# EAGLE board dac (EAGLE 6.1)
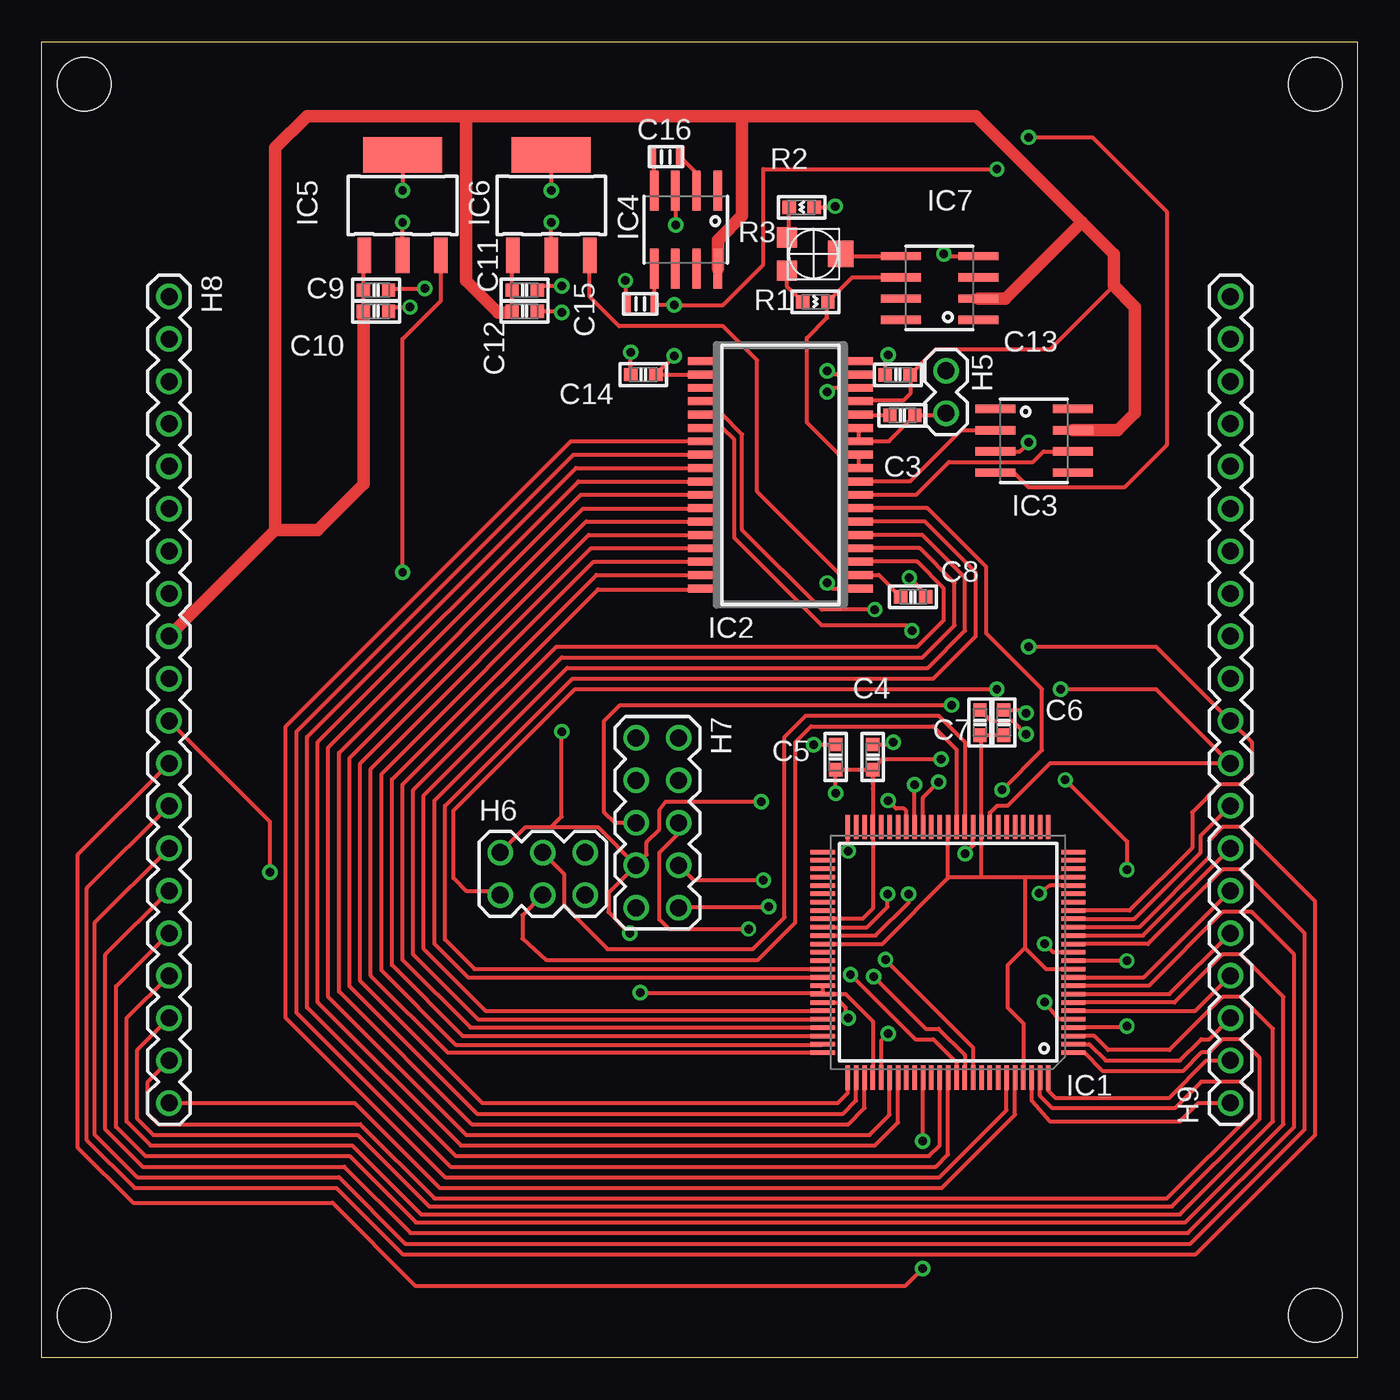
[diagram p0: board, top side]
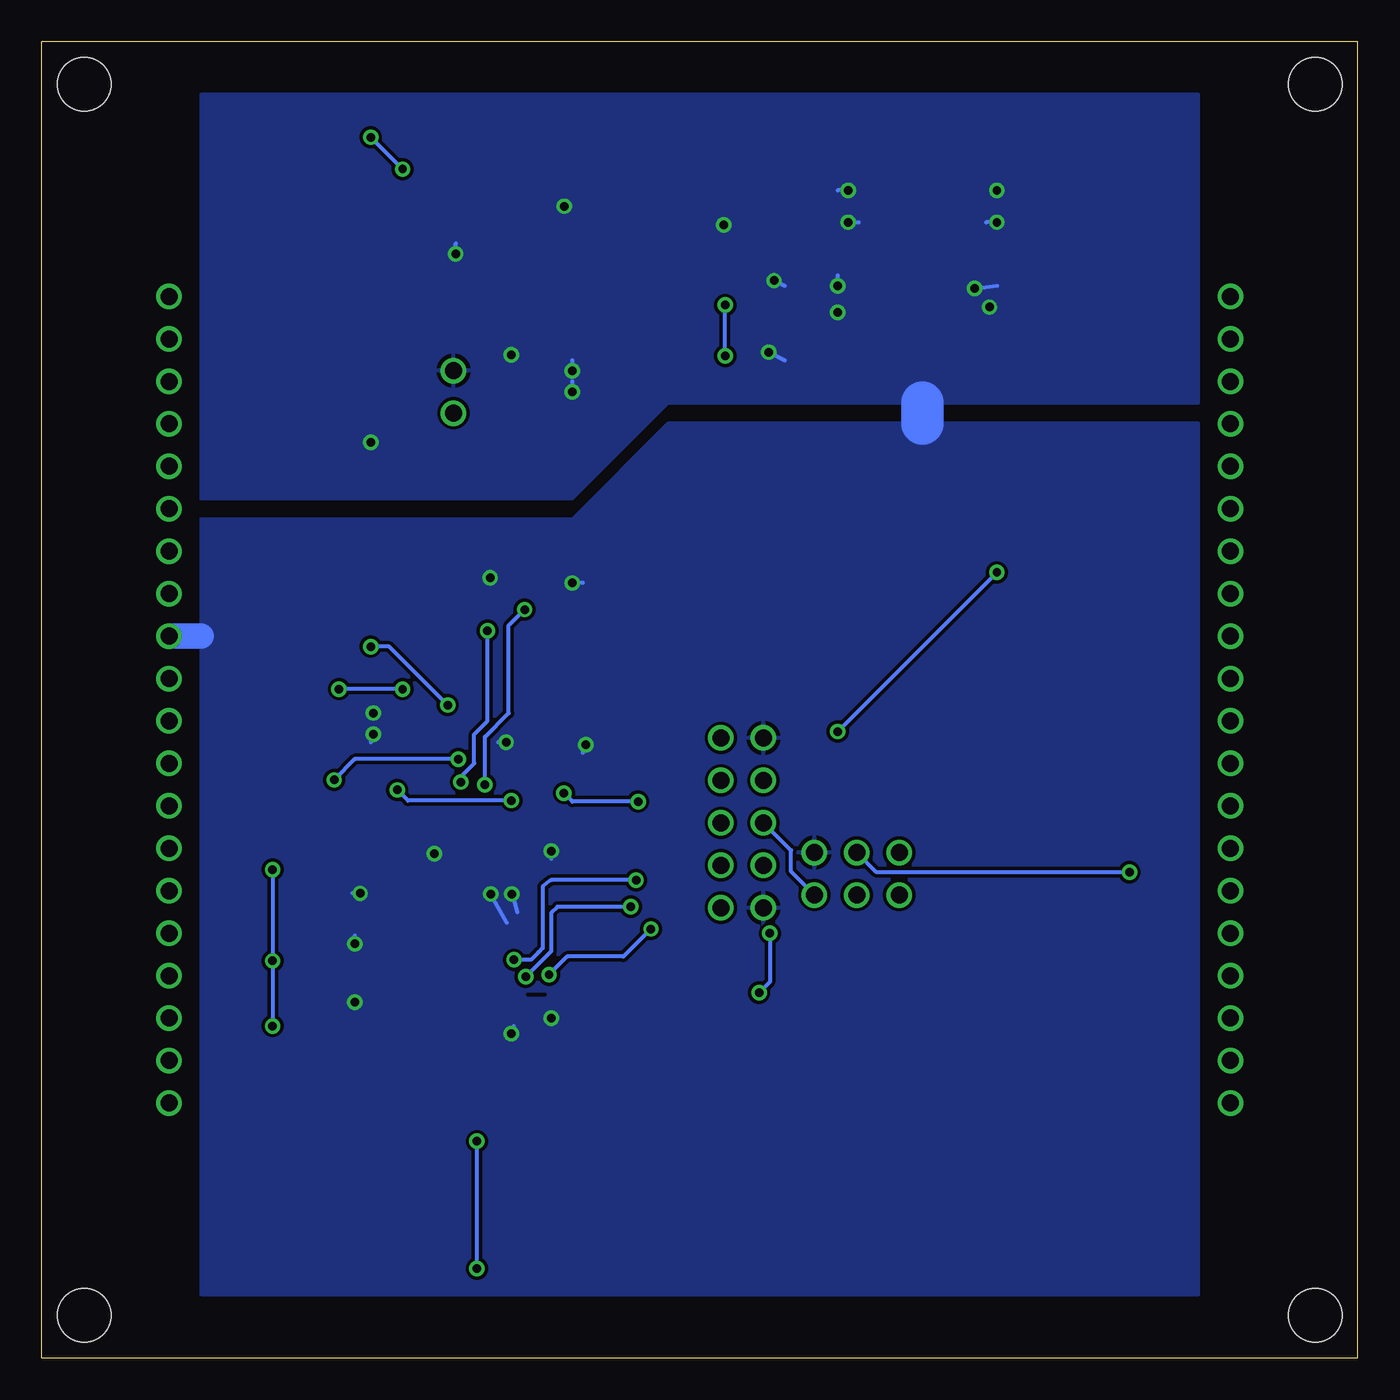
[diagram p1: board, bottom side, seen from below]

Size 78.74 x 78.74 mm. Coordinates in mm from the lower left corner, seen from the top.
Outline: 78.74,0 0,0 0,78.74 78.74,78.74 78.74,0
Copper layers (1*16): Top 0.035mm / dielectric 1.5mm / Bottom 0.035mm
Design rules: minimum track width 8mil, minimum drill 20mil, track to track 8mil, track to pad 8mil, pad to pad 8mil, via to via 8mil, smd to smd 8mil, copper to edge 40mil, drill to drill 8mil, minimum pad ring 10mil, minimum via ring 8mil, stop-mask expansion 4mil, vias tented up to drill 0mil, thermal gap 10mil
Holes 3.2 mm at 2.54,76.2 76.2,76.2 2.54,2.54 76.2,2.54
bRestrict: 1 lines

## Footprints (pad centres in the part's own frame; a part is rotated, then mirrored left to right if it is on the bottom)
CAP-0603 = smd 0.8 x 0.8: 1 -0.75,0; 2 0.75,0
0805 = smd 0.5 x 1.25: 1 -0.85,0; 2 0.85,0
HM2X1-PTH = drill 1.016: 1 -1.27,0; 2 1.27,0
HM3X2-PTH = drill 1.016: 1 -2.54,1.27; 2 0,1.27; 3 2.54,1.27; 4 2.54,-1.27; 5 0,-1.27; 6 -2.54,-1.27
HM5X2-PTH = drill 1.016: 1 -5.08,1.27; 2 -2.54,1.27; 3 0,1.27; 4 2.54,1.27; 5 5.08,1.27; 6 5.08,-1.27; 7 2.54,-1.27; 8 0,-1.27; 9 -2.54,-1.27; 10 -5.08,-1.27
HM20X1-PTH = drill 1.016: 1 -24.13,0; 2 -21.59,0; 3 -19.05,0; 4 -16.51,0; 5 -13.97,0; 6 -11.43,0; 7 -8.89,0; 8 -6.35,0; 9 -3.81,0; 10 -1.27,0; 11 1.27,0; 12 3.81,0; 13 6.35,0; 14 8.89,0; 15 11.43,0; 16 13.97,0; 17 16.51,0; 18 19.05,0; 19 21.59,0; 20 24.13,0
TQFP-100 = smd 1.45 x 0.27: 1 -7.5,6; 2 -7.5,5.5; 3 -7.5,5; 4 -7.5,4.5; 5 -7.5,4; 6 -7.5,3.5; 7 -7.5,3; 8 -7.5,2.5; 9 -7.5,2; 10 -7.5,1.5; 11 -7.5,1; 12 -7.5,0.5; 13 -7.5,0; 14 -7.5,-0.5; 15 -7.5,-1; 16 -7.5,-1.5; 17 -7.5,-2; 18 -7.5,-2.5; 19 -7.5,-3; 20 -7.5,-3.5; 21 -7.5,-4; 22 -7.5,-4.5; 23 -7.5,-5; 24 -7.5,-5.5; 25 -7.5,-6; 51 7.5,-6; 52 7.5,-5.5; 53 7.5,-5; 54 7.5,-4.5; 55 7.5,-4; 56 7.5,-3.5; 57 7.5,-3; 58 7.5,-2.5; 59 7.5,-2; 60 7.5,-1.5; 61 7.5,-1; 62 7.5,-0.5; 63 7.5,0; 64 7.5,0.5; 65 7.5,1; 66 7.5,1.5; 67 7.5,2; 68 7.5,2.5; 69 7.5,3; 70 7.5,3.5; 71 7.5,4; 72 7.5,4.5; 73 7.5,5; 74 7.5,5.5; 75 7.5,6 | smd 0.27 x 1.45: 26 -6,-7.5; 27 -5.5,-7.5; 28 -5,-7.5; 29 -4.5,-7.5; 30 -4,-7.5; 31 -3.5,-7.5; 32 -3,-7.5; 33 -2.5,-7.5; 34 -2,-7.5; 35 -1.5,-7.5; 36 -1,-7.5; 37 -0.5,-7.5; 38 0,-7.5; 39 0.5,-7.5; 40 1,-7.5; 41 1.5,-7.5; 42 2,-7.5; 43 2.5,-7.5; 44 3,-7.5; 45 3.5,-7.5; 46 4,-7.5; 47 4.5,-7.5; 48 5,-7.5; 49 5.5,-7.5; 50 6,-7.5; 76 6,7.5; 77 5.5,7.5; 78 5,7.5; 79 4.5,7.5; 80 4,7.5; 81 3.5,7.5; 82 3,7.5; 83 2.5,7.5; 84 2,7.5; 85 1.5,7.5; 86 1,7.5; 87 0.5,7.5; 88 0,7.5; 89 -0.5,7.5; 90 -1,7.5; 91 -1.5,7.5; 92 -2,7.5; 93 -2.5,7.5; 94 -3,7.5; 95 -3.5,7.5; 96 -4,7.5; 97 -4.5,7.5; 98 -5,7.5; 99 -5.5,7.5; 100 -6,7.5
SSOP-36 = smd 1.7 x 0.47: 1 -4.675,6.8; 2 -4.675,6; 3 -4.675,5.2; 4 -4.675,4.4; 5 -4.675,3.6; 6 -4.675,2.8; 7 -4.675,2; 8 -4.675,1.2; 9 -4.675,0.4; 10 -4.675,-0.4; 11 -4.675,-1.2; 12 -4.675,-2; 13 -4.675,-2.8; 14 -4.675,-3.6; 15 -4.675,-4.4; 16 -4.675,-5.2; 17 -4.675,-6; 18 -4.675,-6.8; 19 4.675,-6.8; 20 4.675,-6; 21 4.675,-5.2; 22 4.675,-4.4; 23 4.675,-3.6; 24 4.675,-2.8; 25 4.675,-2; 26 4.675,-1.2; 27 4.675,-0.4; 28 4.675,0.4; 29 4.675,1.2; 30 4.675,2; 31 4.675,2.8; 32 4.675,3.6; 33 4.675,4.4; 34 4.675,5.2; 35 4.675,6; 36 4.675,6.8
SOIC-8 = smd 2.388 x 0.5: 1 -2.324,1.905; 2 -2.324,0.635; 3 -2.324,-0.635; 4 -2.324,-1.905; 5 2.324,-1.905; 6 2.324,-0.635; 7 2.324,0.635; 8 2.324,1.905
SOT-223-4 = smd 2.11 x 0.81: 1 -3,2.3; 2 -3,0; 3 -3,-2.3 | smd 2.11 x 4.72: 4 3,0
RES-0603 = smd 0.8 x 0.8: 1 -0.75,0; 2 0.75,0
3303W = smd 1.206 x 1.194: 1 -0.997,-1.587; 3 0.997,-1.587 | smd 1.6 x 1.499: 2 0,1.638

## Placement (x,y rotation side)
C3  22pF  [CAP-0603]  51.5,56.39 180 top
C4  4.7uF  [CAP-0603]  49.72,35.94 270 top
C5  1nF  [CAP-0603]  47.5,35.94 270 top
C6  470pF  [CAP-0603]  57.56,38 270 top
C7  2.2uF  [CAP-0603]  56.13,38 270 top
C8  .1uF  [CAP-0603]  52.13,45.53 0 top
C9  47uF  [CAP-0603]  20,63.88 180 top
C10  .1uF  [CAP-0603]  20,62.61 180 top
C11  .1uF  [CAP-0603]  28.89,63.88 180 top
C12  47uF  [CAP-0603]  28.89,62.61 180 top
C13  0.1uF  [CAP-0603]  51.22,58.81 0 top
C14  0.1uF  [CAP-0603]  35.99,58.83 180 top
C15  10uF  [0805]  35.81,63.06 0 top
C16  10uF  [0805]  37.35,71.86 180 top
H5  H2X1-PTH  [HM2X1-PTH]  54.1,57.79 90 top
H6  HM3X2-PTH  [HM3X2-PTH]  29.97,28.96 0 top
H7  HM5X2-PTH  [HM5X2-PTH]  36.83,32 270 top
H8  HM20X1-PTH  [HM20X1-PTH]  7.62,39.37 270 top
H9  HM20X1-PTH  [HM20X1-PTH]  71.12,39.37 90 top
IC1  AT32UC3A-TQFP-100  [TQFP-100]  54.23,24.26 180 top
IC2  LTC1821-SSOP-36  [SSOP-36]  44.2,52.83 180 top
IC3  LT1001-SOIC-8  [SOIC-8]  59.37,54.86 0 top
IC4  TC7662B-SOIC-8  [SOIC-8]  38.54,67.5 270 top
IC5  3.3V  [SOT-223-4]  21.59,68.96 90 top
IC6  5V  [SOT-223-4]  30.48,68.96 90 top
IC7  10V  [SOIC-8]  53.72,64.01 180 top
R1  90.9k  [RES-0603]  46.29,63.18 0 top
R2  4.02k  [RES-0603]  45.47,68.83 180 top
R3  5k  [3303W]  46.16,66.04 270 top

## Library data of the parts
C3-C16 IC1-IC7 R1-R3 = july13b
H5-H9 = august24

## Nets
1: H9.20
2: H9.19
3: H9.18
4: H9.17
5: H9.16
6: H9.15
7: H9.14
8: H9.13
9: C4.1 C5.1 C6.1 C7.1 C8.2 C9.1 C10.1 C11.1 C12.1 C13.1 C14.2 C15.1 H5.2 H6.3 H7.6 H7.10 H9.12 IC1.5 IC1.13 IC1.21 IC1.35 IC1.50 IC1.60 IC1.61 IC1.69 IC1.80 IC2.1 IC2.16 IC2.17 IC3.3 IC4.3 IC5.2 IC5.4 IC6.2 IC6.4 IC7.4 R2.1
10: H9.11
11: H6.4 H7.8 H9.10 IC1.18
12: H6.6 H9.9 IC1.33
13: H9.8 IC1.17
14: H9.7 IC1.15
15: H9.6 IC1.10
16: H9.5 IC1.8
17: H9.4 IC1.6
18: H9.3 IC1.2
19: H9.2 IC1.100
20: H9.1 IC1.98
21: H8.20 IC1.96
22: H8.19 IC1.99
23: H8.18 IC1.1
24: H8.17 IC1.3
25: H8.16 IC1.7
26: H8.15 IC1.9
27: H8.14 IC1.14
28: H8.13 IC1.16
29: H8.12 IC1.85
30: H6.2 H8.11 IC1.36
31: H8.10
32: C9.2 C10.2 C11.2 C12.2 C13.2 H8.9 IC2.15 IC3.7 IC4.8 IC5.1 IC6.1 IC7.2
33: H8.8
34: H8.7
35: H8.6
36: H8.5
37: H8.4
38: H8.3
39: H8.2
40: H8.1
N$1: IC2.9 IC3.2
N$2: C8.1 IC2.2 IC6.3
N$3: IC2.8 IC3.6
N$4: C3.1 H5.1 IC2.12 IC2.13
N$5: C3.2 IC2.14
N$6: C16.1 IC4.2
N$7: C16.2 IC4.4
N$8: C4.2 C5.2 H6.1 H7.7 IC1.4 IC1.12 IC1.47 IC1.59 IC1.67 IC1.68 IC1.79 IC5.3
N$9: C6.2 C7.2 IC1.11 IC1.22 IC1.34 IC1.38 IC1.62 IC1.97
N$10: C14.1 C15.2 IC2.20 IC3.4 IC4.5
N$11: IC1.65 IC2.6
N$12: IC1.66 IC2.5
N$13: IC1.70 IC2.4
N$14: IC1.71 IC2.3
N$15: IC1.72 IC2.36
N$16: IC1.73 IC2.35
N$17: IC1.74 IC2.34
N$18: IC1.75 IC2.33
N$19: IC1.76 IC2.32
N$20: IC1.77 IC2.31
N$21: IC1.78 IC2.30
N$22: IC1.81 IC2.29
N$23: IC1.82 IC2.28
N$24: IC1.87 IC2.27
N$25: IC1.88 IC2.26
N$26: IC1.95 IC2.25
N$27: IC1.41 IC2.24
N$28: IC1.42 IC2.23
N$29: IC1.43 IC2.7
N$30: IC2.10 IC2.11 IC7.6 R1.2
N$31: IC7.5 R3.2
N$32: R1.1 R3.3
N$33: R2.2 R3.1
N$34: H7.5 IC1.90
N$35: H7.4 IC1.91
N$36: H7.3 IC1.89
N$37: IC1.92
N$39: H6.5 IC1.37

## Tracks (layer width: path | path; a pad name or v marks a point on that pad's centre or on a via)
9  (via drill 0.51)
  Top 0.254: IC5.4 v21.59,69.85 | IC5.2 v21.59,67.94 | C9.1 20.85,63.98 v22.92,63.98 | C10.1 21.01,62.87 v22.04,62.87 | IC6.4 v30.48,69.85 | IC6.2 v30.48,67.94 | C11.1 29.9,64.14 v31.11,64.14 | C12.1 31.02,62.61 v31.11,62.55 | C15.1 34.96,64.1 v34.93,64.45 | C14.2 35.24,59.37 v35.24,60.17 | IC4.3 37.91,67.98 v37.94,67.79 | R2.1 47.4,68.83 v47.47,68.9 | IC7.4 54.1,65.91 v53.98,66.04 | IC2.16 47.24,58.03 v46.99,57.79 | IC2.17 47.21,58.83 v46.99,59.05 | C13.1 50.47,59.84 v50.64,60.01 | IC3.3 58.52,54.23 v59.05,54.77 | C8.2 52.88,45.7 v51.91,46.67 | IC2.1 47.31,46.03 v46.99,46.36 | C5.1 46.53,36.69 v46.2,36.67 | C4.1 50.82,36.69 v50.96,36.83 | IC1.50 48.23,30.51 v48.26,30.32 | C6.1 58.72,38.76 v58.9,38.58 | IC1.60 49.38,25.76 50.61,26.99 v50.61,27.75 | IC1.69 47.8,21.26 48.1,20.95 48.1,20.48 v48.26,20.32 | IC1.21 60.32,28.26 v59.69,27.78 | IC1.5 60.86,20.26 v60.01,21.27 | IC1.35 55.73,30.65 v55.25,30.16 | IC1.80 50.23,18.99 v50.64,19.4 | IC1.13 60.52,24.26 v60.01,24.77 | IC1.61 49.9,25.26 51.88,27.24 v51.88,27.75 | C7.1 56.79,38.1 58.1,38.1 v58.9,37.31
  Bottom 0.254: v21.59,67.94 22.22,67.94 | v22.92,63.98 21.59,64.14 | 21.59,64.14 | v22.04,62.87 22.22,62.87 | v30.48,69.85 31.11,69.85 | v30.48,67.94 29.84,67.94 | v31.11,64.14 31.11,64.77 | v31.11,62.55 31.11,62.23 | v34.93,64.45 34.29,64.14 | v35.24,60.17 34.29,59.69 | v37.94,67.79 38.1,67.94 | v47.47,68.9 47.47,69.06 47.62,69.21 | v53.98,66.04 53.98,66.67 | H5.2 54.61,59.05 | v46.99,57.79 46.99,58.42 | v46.99,59.05 46.99,59.69 | v50.64,60.01 50.64,60.17 50.8,60.33 | v59.05,54.77 59.05,54.61 | v51.91,46.67 51.91,46.83 52.07,46.99 | 46.36,46.36 v46.99,46.36 | v46.2,36.67 46.36,36.2 | v50.96,36.83 51.44,36.83 | v48.26,30.32 48.26,29.84 | v58.9,38.58 59.05,38.58 | v50.61,27.75 50.29,26.67 | v48.26,20.32 48.26,20 | v59.69,27.78 60.17,27.78 | v60.01,21.27 59.85,21.59 | v55.25,30.16 55.56,30.32 | v50.64,19.4 50.48,19.84 | v60.01,24.77 60.01,25.24 | v51.88,27.75 50.93,26.04 | v58.9,37.31 59.05,36.83
  Bottom 1.524: 69.21,43.18 H9.12
  Bottom 2.54: 26.04,55.88 26.04,57.15
  pour Bottom: 69.21,51.44 46.99,51.44 41.28,57.15 9.53,57.15 9.53,75.56 69.21,75.56
  pour Bottom: 9.53,55.88 41.28,55.88 46.99,50.17 69.21,50.17 69.21,3.81 9.53,3.81
11  (via drill 0.51)
  Top 0.254: H7.8 34.29,32 33.66,32.64 33.66,38.1 34.61,39.05 v54.45,39.05 | IC1.18 65.08,26.76 68.83,30.51 68.83,32.64 70.48,34.29 71.75,34.29 72.39,34.93 72.39,36.83 H9.10 66.67,42.55 v59.05,42.55
  Bottom 0.254: v59.05,42.55 57.94,42.55 v54.45,39.05 | H6.4 33.91,29.08 33.91,30.35 H7.8
12  (via drill 0.51)
  Top 0.254: IC1.33 56.73,32.6 57.15,33.02 57.79,33.02 60.33,35.56 H9.9 66.67,40.01 v60.96,40.01 | v57.15,40.01 31.91,40.01 24.64,32.73 24.64,28.7 25.4,27.94 27.18,27.94 H6.6
  Bottom 0.254: v57.15,40.01 v60.96,40.01
13
  Top 0.254: IC1.17 65.37,26.26 69.34,30.23 69.34,31.24 H9.8
14
  Top 0.254: IC1.15 65.9,25.26 H9.7
15
  Top 0.254: IC1.10 65.94,22.76 H9.6
16
  Top 0.254: IC1.8 67.48,21.76 H9.5
17
  Top 0.254: IC1.6 69.02,20.76 H9.4
18
  Top 0.254: IC1.2 62.68,18.76 63.66,17.78 68.1,17.78 69.37,19.05 69.85,19.05 H9.3
19
  Top 0.254: IC1.100 60.23,15.97 60.64,15.56 67.47,15.56 69.69,17.78 H9.2
20
  Top 0.254: IC1.98 59.23,15.38 60.33,14.13 68.1,14.13 69.21,15.24 H9.1
21
  Top 0.254: H8.20 18.73,15.24 23.81,10.16 53.85,10.16 58.23,14.54 IC1.96
22
  Top 0.254: H8.19 6.35,16.51 6.35,14.61 6.98,13.97 19.05,13.97 23.5,9.53 67.31,9.53 72.39,14.61 72.39,15.88 71.75,16.51 69.37,16.51 67.79,14.92 60.48,14.92 59.73,15.68 IC1.99
23
  Top 0.254: H8.18 5.71,18.41 5.71,14.29 6.67,13.33 18.89,13.33 23.18,9.05 67.63,9.05 72.87,14.29 72.87,17.94 71.75,19.05 70.64,19.05 69.85,18.26 69.38,18.26 68.26,17.14 63.5,17.14 62.39,18.26 IC1.1
24
  Top 0.254: H8.17 5.08,20.32 5.08,14.13 6.51,12.7 18.57,12.7 22.7,8.57 68.1,8.57 73.66,14.13 73.66,19.68 71.75,21.59 70.64,21.59 67.47,18.41 63.82,18.41 62.98,19.26 IC1.3
25
  Top 0.254: IC1.7 67.77,21.26 70.64,24.13 71.75,24.13 74.3,21.59 74.3,13.97 68.42,8.1 22.38,8.1 18.41,12.06 6.19,12.06 4.45,13.81 4.45,22.22 H8.16
26
  Top 0.254: IC1.9 66.23,22.26 70.64,26.67 72.39,26.67 74.93,24.13 74.93,13.81 68.58,7.46 22.07,7.46 18.1,11.43 6.03,11.43 3.81,13.65 3.81,24.13 H8.15
27
  Top 0.254: IC1.14 66.19,24.76 70.64,29.21 71.75,29.21 75.56,25.4 75.56,13.65 68.74,6.83 21.75,6.83 17.78,10.79 5.71,10.79 3.17,13.33 3.17,26.04 H8.14
28
  Top 0.254: IC1.16 65.67,25.76 69.85,29.97 69.85,30.96 70.64,31.75 71.75,31.75 76.2,27.3 76.2,13.33 69.06,6.19 21.59,6.19 17.62,10.16 5.56,10.16 2.7,13.02 2.7,28.1 H8.13
29  (via drill 0.51)
  Top 0.254: H8.12 2.16,30.1 2.16,12.57 5.46,9.27 17.4,9.27 22.35,4.32 51.69,4.32 v52.71,5.33 | IC1.85 52.73,13.11 v52.71,12.95
  Bottom 0.254: v52.71,5.33 v52.71,12.95
30  (via drill 0.51)
  Top 0.254: IC1.36 55.23,36.85 53.66,38.42 45.72,38.42 44.45,37.15 44.45,26.35 42.55,24.45 33.85,24.45 31.24,27.05 31.24,28.96 H6.2 | v13.65,29.05 13.65,32.07 H8.11
  Bottom 0.254: v13.65,29.05 28.8,29.05 H6.2
32
  Top 0.254: IC6.1 28.14,65.92 C11.2 C12.2 28.08,62.55 | IC5.1 19.25,65.92 C9.2 C10.2 | IC2.15 48.92,57.28 51.56,57.28 51.97,57.68 C13.2 53.48,60.33 60.33,60.33 64.14,64.14
  Top 0.762: H8.9 13.97,49.53 | 13.97,49.53 13.97,72.39 15.88,74.3 25.4,74.3 | 25.4,74.3 41.91,74.3 | 41.91,74.3 55.88,74.3 62.23,67.94 | 62.23,67.94 64.14,66.04 64.14,64.14 65.41,62.87 65.41,56.52 64.39,55.5 IC3.7 | IC7.2 57.66,63.37 62.23,67.94 | 13.97,49.53 16.51,49.53 19.25,52.27 C10.2 | IC4.8 40.45,66.87 41.91,68.33 41.91,74.3 | 25.4,74.3 25.4,64.45 27.3,62.55 28.08,62.55
N$1
  Top 0.254: IC2.9 48.89,52.45 51.98,52.45 55.02,55.5 IC3.2
N$2
  Top 0.254: C8.1 50.08,46.83 IC2.2 48.84,46.86 47.75,46.86 42.8,51.82 42.8,59.69 40.77,61.72 34.54,61.72 32.78,63.49 IC6.3
N$3
  Top 0.254: IC2.8 52.33,51.63 54.29,53.59 59.31,53.59 59.94,54.23 IC3.6
N$4
  Top 0.254: H5.1 53.91,56.39 C3.1 50.69,54.83 IC2.12 IC2.13
N$5
  Top 0.254: C3.2 48.92,56.39 IC2.14
N$6
  Top 0.254: C16.1 39.18,70.88 IC4.2
N$7
  Top 0.254: C16.2 36.64,71.72 IC4.4
N$8  (via drill 0.51)
  Top 0.254: C4.2 49.73,34.03 IC1.47 49.73,26.87 49.12,26.26 IC1.59 | C4.2 C5.2 v47.5,33.78 | IC1.68 IC1.67 | v35.18,25.4 33.91,26.67 33.91,27.81 H7.7 | v35.81,21.84 46.69,21.84 IC1.68 | C4.2 49.72,34.74 | C4.2 49.72,34.35 | IC1.12 61.74,23.75 | IC1.12 61.72,23.75 | H7.7 36.2,30.1 36.2,30.86 36.96,31.62 36.96,32.77 37.34,33.27 v43.05,33.27 | C4.2 50.31,35.83 v53.82,35.81 | IC1.68 48.09,21.76 49.73,20.12 IC1.79 | 30.48,31.75 31.11,32.38 v31.11,37.47 | v21.59,46.99 21.59,60.96 23.89,63.26 IC5.3 | v64.93,19.84 64.84,19.76 IC1.4 | v64.93,23.75 v64.92,23.76 IC1.12 | v61.25,34.58 64.93,30.89 v64.93,29.21 | H6.1 28.96,31.75 30.48,31.75 | 30.48,31.75 33.27,31.75 H7.7
  Bottom 0.254: v35.18,25.4 35.18,22.48 v35.81,21.84 | v61.25,34.58 60.01,35.81 v53.82,35.81 | v64.93,29.21 v64.93,23.75 v64.93,19.84 | v43.05,33.27 46.99,33.27 v47.5,33.78 | v31.11,37.47 v21.59,46.99
N$9
  Top 0.254: IC1.11 60.09,23.26 58.83,24.52 | IC1.97 58.74,20 57.79,20.95 57.79,23.48 58.83,24.52 | 58.83,28.76 IC1.22 | 58.83,28.76 58.83,24.52 | C6.2 C7.2 56.23,37.16 IC1.34 56.23,28.79 56.2,28.76 | 56.2,28.76 54.29,28.76 54.23,28.82 | 56.2,28.76 58.83,28.76 | 54.23,28.82 IC1.38 | IC1.62 50.29,24.76 54.23,28.69 54.23,28.82
N$10  (via drill 0.51)
  Top 0.254: IC2.20 C14.1 v37.85,59.94 | IC4.5 36.66,65.15 C15.2 36.73,62.99 v37.85,62.99 40.77,62.99 43.18,65.41 43.18,71.12 v57.15,71.12 | IC3.4 58.17,52.96 59.05,52.07 64.77,52.07 67.31,54.61 67.31,68.58 62.87,73.02 v59.05,73.02
  Bottom 0.254: v37.85,59.94 v37.85,62.99 | v57.15,71.12 v59.05,73.02
N$11
  Top 0.254: IC2.6 52.84,50.03 55.88,46.99 55.88,43.18 53.34,40.64 31.75,40.64 24.13,33.02 24.13,25.02 25.89,23.26 IC1.65
N$12
  Top 0.254: IC2.5 52.69,49.23 55.25,46.67 55.25,43.5 53.02,41.28 31.43,41.28 23.5,33.34 23.5,24.77 25.5,22.76 IC1.66
N$13
  Top 0.254: IC2.4 52.53,48.43 54.61,46.36 54.61,43.82 52.71,41.91 31.11,41.91 22.86,33.66 22.86,24.45 26.55,20.76 IC1.70
N$14
  Top 0.254: IC1.71 26.1,20.26 22.22,24.13 22.22,33.97 30.8,42.55 52.39,42.55 53.98,44.13 53.98,46.04 52.39,47.62 IC2.3
N$15
  Top 0.254: IC2.36 39.46,45.97 33.27,45.97 21.59,34.29 21.59,23.81 25.64,19.76 IC1.72
N$16
  Top 0.254: 39.49,46.86 IC2.35 33.18,46.83 20.95,34.61 20.95,23.5 25.19,19.26 IC1.73
N$17
  Top 0.254: IC2.34 33.03,47.63 20.32,34.93 20.32,23.18 24.77,18.73 46.7,18.73 IC1.74
N$18
  Top 0.254: 39.48,48.39 IC2.33 32.88,48.43 19.68,35.24 19.68,22.86 24.29,18.26 IC1.75
N$19
  Top 0.254: 39.48,49.28 IC2.32 32.72,49.23 19.05,35.56 19.05,22.54 26.35,15.24 47.62,15.24 48.23,15.84 IC1.76
N$20
  Top 0.254: IC2.31 32.57,50.03 18.41,35.88 18.41,22.22 26.04,14.61 47.94,14.61 48.73,15.39 IC1.77
N$21
  Top 0.254: IC2.30 39.49,50.8 32.38,50.8 17.78,36.2 17.78,21.91 25.72,13.97 48.26,13.97 49.23,14.94 IC1.78
N$22
  Top 0.254: 39.46,51.69 IC2.29 32.26,51.63 17.14,36.51 17.14,21.59 25.4,13.33 49.53,13.33 50.73,14.53 IC1.81
N$23
  Top 0.254: 39.5,52.45 IC2.28 32.11,52.43 16.51,36.83 16.51,21.27 25.08,12.7 49.85,12.7 51.23,14.08 IC1.82
N$24
  Top 0.254: 39.41,53.34 IC2.27 31.96,53.23 15.88,37.15 15.88,20.95 24.77,12.06 53.09,12.06 53.73,12.71 IC1.87
N$25
  Top 0.254: 39.45,54.1 IC2.26 31.81,54.03 15.24,37.47 15.24,20.64 24.45,11.43 53.5,11.43 54.23,12.16 IC1.88
N$26
  Top 0.254: 39.49,54.86 IC2.25 31.65,54.83 14.61,37.78 14.61,20.32 24.13,10.79 53.72,10.79 57.73,14.8 IC1.95
N$27  (via drill 0.51)
  Top 0.254: IC1.41 52.73,33.52 v53.66,34.45 | IC2.24 40.73,55.63 41.43,54.93 41.43,49.05 46.67,43.82 51.75,43.82 v52.07,43.5
  Bottom 0.254: v53.66,34.45 53.66,34.77 52.86,35.56 52.86,37.31 52.07,38.1 v52.07,43.5
N$28  (via drill 0.51)
  Top 0.254: 39.48,56.39 IC2.23 40.72,56.43 41.91,55.25 41.91,49.53 46.67,44.77 v49.85,44.77 | IC1.42 v52.23,34.29
  Bottom 0.254: v52.23,34.29 52.23,37.15 50.8,38.58 50.8,43.82 v49.85,44.77
N$29  (via drill 0.51)
  Top 0.254: v57.47,33.97 59.85,36.35 59.85,40.01 56.52,43.34 56.52,47.31 52.99,50.83 IC2.7 | IC1.43 51.73,32.73 51.59,32.86 51.12,32.86 v50.64,33.34
  Bottom 0.254: v50.64,33.34 56.83,33.34 v57.47,33.97
N$30
  Top 0.254: IC7.6 48.5,64.64 R1.2 46.99,63.13 46.99,62.23 45.77,61.01 45.77,55.96 47.75,53.98 48.81,53.98 IC2.11 IC2.10
N$31
  Top 0.254: R3.2 47.99,65.91 IC7.5
N$32
  Top 0.254: R3.3 44.59,64.08 R1.1
N$33
  Top 0.254: R3.1 44.72,66.86 R2.2
N$34  (via drill 0.51)
  Top 0.254: IC1.90 55.23,18.11 53.66,19.68 52.9,19.68 v49.78,22.8 | H7.5 38.16,26.99 v43.5,26.99
  Bottom 0.254: v43.5,26.99 47.88,26.99 48.26,26.61 48.26,24.32 v49.78,22.8
N$35  (via drill 0.51)
  Top 0.254: H7.4 38.99,28.57 v43.18,28.57 | v50.48,23.81 55.73,18.57 IC1.91
  Bottom 0.254: v43.18,28.57 48.26,28.57 48.77,28.19 48.77,24.51 49.02,24.26 49.47,23.81 v50.48,23.81
N$36  (via drill 0.51)
  Top 0.254: H7.3 38.1,31.37 36.96,30.23 36.96,26.23 37.53,25.65 v42.29,25.65 | v48.39,22.92 52.26,19.05 53.34,19.05 54.73,17.66 IC1.89
  Bottom 0.254: v42.29,25.65 43.94,24 47.31,24 v48.39,22.92
N$39
  Top 0.254: IC1.37 54.73,36.39 53.34,37.78 46.04,37.78 45.09,36.83 45.09,26.04 42.86,23.81 30.16,23.81 28.77,25.08 28.77,26.48 H6.5